# Altium PCB Solder Training Tier 2.PcbDoc
Units mil, origin at the board's own origin, x right, y up, seen from the top; angles counter-clockwise.
Board outline 3015 x 2000 mil, 2 copper layers (Top Layer, Bottom Layer); 54 components, 36 nets, 150 pads, 0 vias.
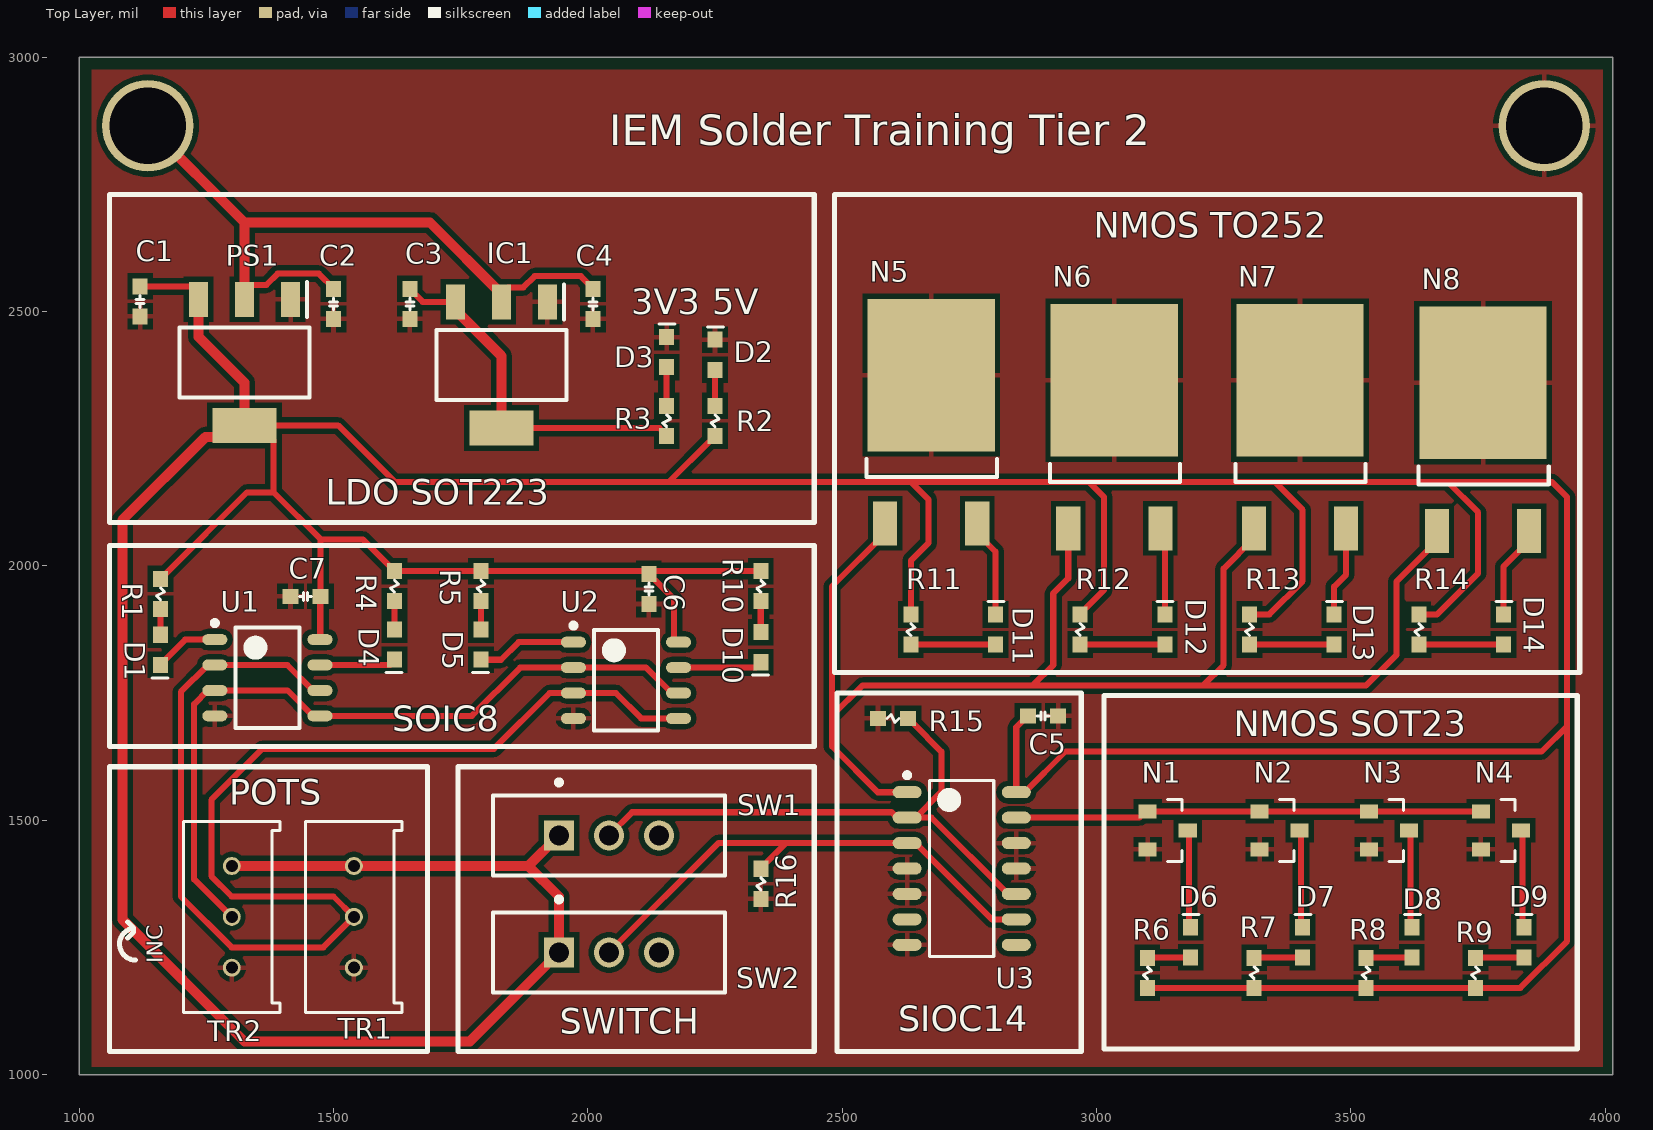
[diagram p0: Top Layer view]
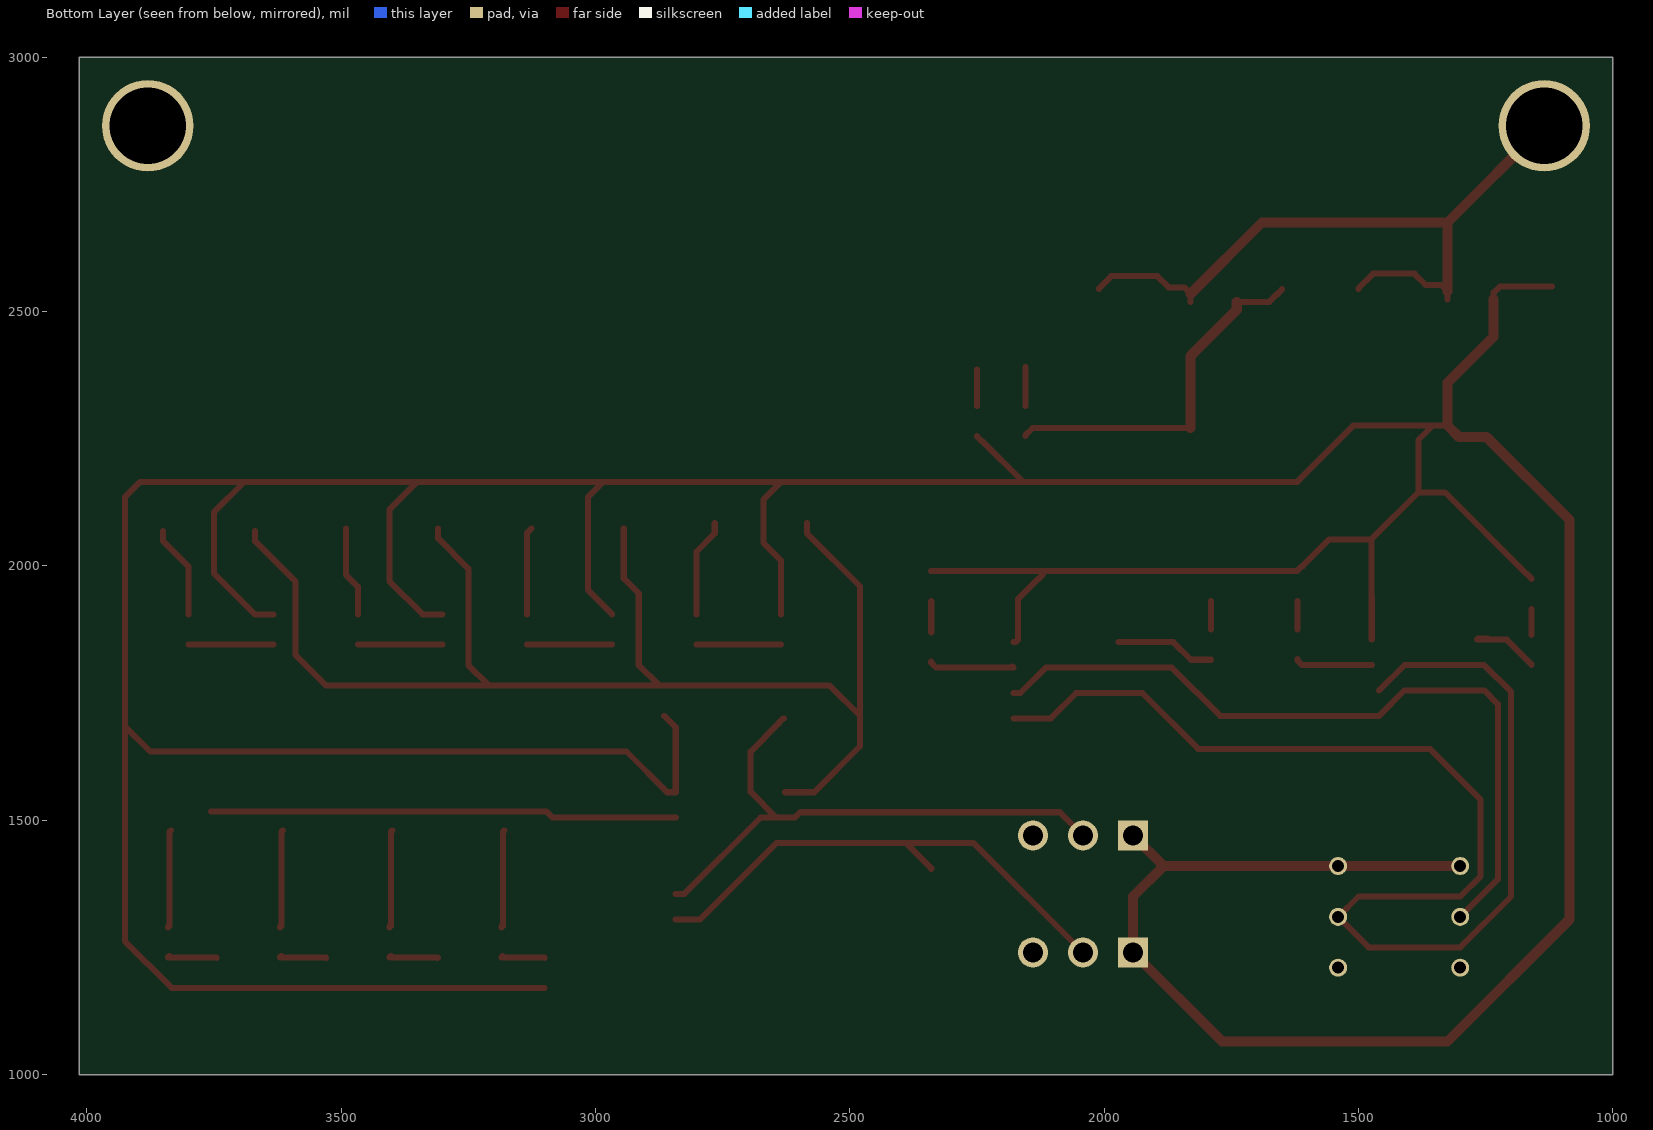
[diagram p1: Bottom Layer view, seen from below]
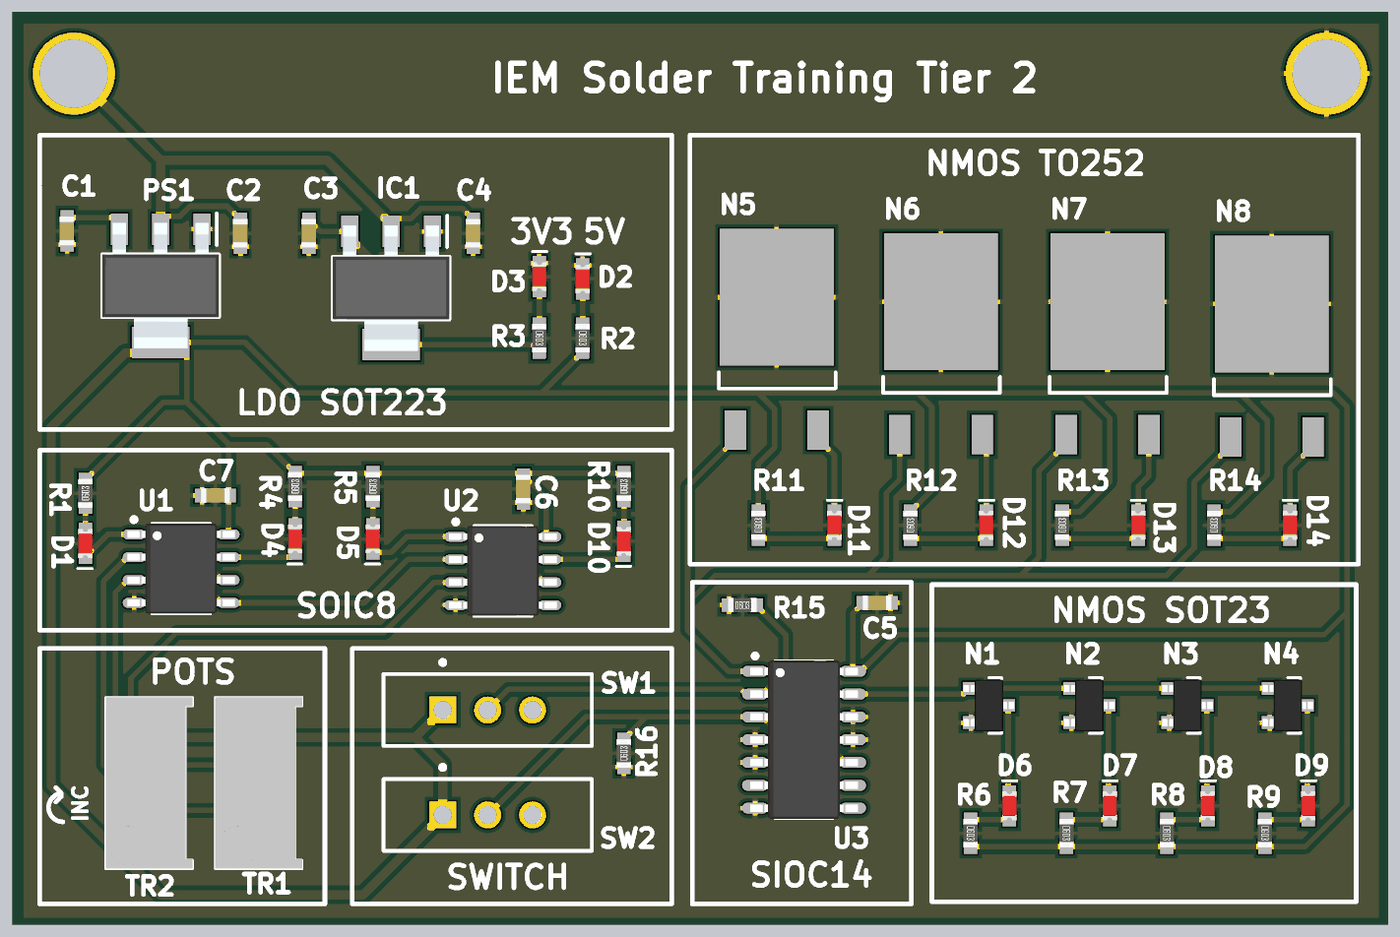
[diagram p2: 3D render of the assembled board from above, using the file's embedded part models]

## Layer stack, top to bottom
Top Solder: solder mask 0.4, Solder Resist, Dk 3.5
Top Layer: signal copper 1.4
Dielectric 1: dielectric 12.6, FR-4, Dk 4.8
Bottom Layer: signal copper 1.4
Bottom Solder: solder mask 0.4, Solder Resist, Dk 3.5

## Board outline
1000,1000 4015,1000 4015,3000 1000,3000

## Design rules (kind name [scope] priority, off if disabled: settings)
Clearance [All] p1: gap=10 ignorepadtopadclearanceinfootprint=FALSE except(0: Arc-Hole Track-Hole SMDPad-Hole THPad-Hole Via-Hole Fill-Hole Poly-Hole Region-Hole Text-Hole)
PolygonConnect [All] p1: connectstyle=Relief reliefconductorwidth=10 reliefentries=4 polygonreliefangle="90 Angle" airgapwidth=10
RoutingVias [All] p1: holewidth=28 width=50 viastyle="Through Hole" minholewidth=28 minwidth=50 maxholewidth=28 maxwidth=50
SolderMaskExpansion [All] p1: expansion=4 istentingtop=FALSE
Width [All] p1: maxlimit=20 minlimit=10 preferedwidth=10 minimp=50.000000 maximp=50.000000 favimp=50.000000
30 further rules are at their usual default settings.

## Components (designator, comment, footprint, x,y, rotation, side; value= is the part's Value field where it differs from the comment)
C1 "2.2uF" CAP-0603 1120,2520 r90 top
C2 "4.7uF" CAP-0603 1500,2515 r90 top
C3 "2.2uF" CAP-0603 1650,2515 r90 top
C4 "4.7uF" CAP-0603 2010,2515 r90 top
C5 "1uF" CAP-0603 2895,1705 r180 top
C6 "1uF" CAP-0603 2120,1954.53 r90 top
C7 "1uF" CAP-0603 1445,1940 r0 top
D1 "LEDRED-0603" LEDRED-0603 1160,1835 r270 top
D2 "LEDRED-0603" LEDRED-0603 2250,2415 r90 top
D3 "LEDRED-0603" LEDRED-0603 2155,2420 r90 top
D4 "LEDRED-0603" LEDRED-0603 1620,1845 r270 top
D5 "LEDRED-0603" LEDRED-0603 1790,1845 r270 top
D6 "LEDRED-0603" LEDRED-0603 3185,1260 r90 top
D7 "LEDRED-0603" LEDRED-0603 3405,1260 r90 top
D8 "LEDRED-0603" LEDRED-0603 3620,1260 r90 top
D9 "LEDRED-0603" LEDRED-0603 3840,1260 r90 top
D10 "LEDRED-0603" LEDRED-0603 2340,1840 r270 top
D11 "LEDRED-0603" LEDRED-0603 2801.43,1875 r90 top
D12 "LEDRED-0603" LEDRED-0603 3134.29,1875 r90 top
D13 "LEDRED-0603" LEDRED-0603 3467.14,1875 r90 top
D14 "LEDRED-0603" LEDRED-0603 3800,1875 r90 top
IC1 "SPX1117M3-L-3-3_TR" SOT230P700X180-4N 1830,2395 r270 top
N1 "NMOS-SOT23" SOT23 3140,1480 r270 top
N2 "NMOS-SOT23" SOT23 3360,1480 r270 top
N3 "NMOS-SOT23" SOT23 3575,1480 r270 top
N4 "NMOS-SOT23" SOT23 3795,1480 r270 top
N5 "NMOS-TO252" TO252 2674.17,2375.35 r0 top
N6 "NMOS-TO252" TO252 3034.17,2365.35 r0 top
N7 "NMOS-TO252" TO252 3399.17,2365.35 r0 top
N8 "NMOS-TO252" TO252 3759.17,2360.35 r0 top
PS1 "SPX1117M3-L-5-0_TR" SOT230P700X170-4N 1325,2400 r270 top
R1 "330" RES-0603 1160,1945 r90 top
R2 "330" RES-0603 2250,2285 r270 top
R3 "200" RES-0603 2155,2285 r270 top
R4 "330" RES-0603 1620,1960 r90 top
R5 "330" RES-0603 1790,1960 r90 top
R6 "330" RES-0603 3100,1200 r270 top
R7 "330" RES-0603 3310,1200 r270 top
R8 "330" RES-0603 3530,1200 r270 top
R9 "330" RES-0603 3745,1200 r270 top
R10 "330" RES-0603 2340,1960 r90 top
R11 "330" RES-0603 2635,1875 r90 top
R12 "330" RES-0603 2967.86,1875 r90 top
R13 "330" RES-0603 3300.71,1875 r90 top
R14 "330" RES-0603 3633.57,1875 r90 top
R15 "5k" RES-0603 2600,1700 r0 top
R16 "5k" RES-0603 2340,1375 r90 top
SW1 "EG1218" ESWI-EG1218_V 2041.57,1470 r0 top
SW2 "EG1218" ESWI-EG1218_V 2041.57,1240 r0 top
TR1 "TRIMPOT_PV36W" TRIMPOT_PV36W 1540,1310 r270 top
TR2 "TRIMPOT_PV36W" TRIMPOT_PV36W 1300,1310 r270 top
U1 "LM393DT" STM-SO-8_D_L 1370,1780 r0 top
U2 "LM393DT" STM-SO-8_D_L 2075,1775 r0 top
U3 "IC-SOIC14_CD4072BM96" SOIC127P600X175-14N 2735,1405 r0 top

## Footprints (in the part's own frame and the unit in brackets; to place one, negate y for a bottom-side part, rotate by r counter-clockwise, add the part's x,y. Pads: shape width x height; smd on the part's side, far side on the other; paste and mask are expansions set on the pad)
CAP-0603 [mm]
  rect 0.8x0.75 smd: 1(-0.75,0) 2(0.75,0)
  silkscreen extent -0.3,-0.2 0.3,0.2, body extent -0.8,-0.4 0.8,0.42, height 0.81
ESWI-EG1218_V [mm] "THD, 3-Leads, Body 11.6x4mm, Pitch 2.5mm"
  rect 1.5x1.5 hole 1: 1(-2.5,0)
  round 1.5 hole 1: 2(0,0) 3(2.5,0)
  silkscreen extent -5.8,-2 5.8,2.77, body extent -5.8,-2 5.8,2, height 7.4
LEDRED-0603 [mm]
  rect 0.8x0.75 smd: A(-0.75,0) K(0.75,0)
  silkscreen extent 1.4,-0.42 1.4,0.38, body extent -0.8,-0.4 0.8,0.4, height 0.53
RES-0603 [mm]
  rect 0.8x0.75 smd: 1(-0.75,0) 2(0.75,0)
  silkscreen extent -0.3,-0.2 0.3,0.2, body extent -0.8,-0.4 0.8,0.4, height 0.44
SOIC127P600X175-14N [mm] "SOIC, 14-Leads, Body 8.65x3.90mm, Pitch 1.27mm, IPC Medium Density"
  oval 1.45x0.6 smd: 1(-2.725,3.81) 2(-2.725,2.54) 3(-2.725,1.27) 4(-2.725,0) 5(-2.725,-1.27) 6(-2.725,-2.54) 7(-2.725,-3.81) 8(2.725,-3.81) 9(2.725,-2.54) 10(2.725,-1.27) 11(2.725,0) 12(2.725,1.27) 13(2.725,2.54) 14(2.725,3.81)
  silkscreen extent -2.85,-4.4 1.6,4.78, body extent -3,-4.4 3,4.4, height 1.75
SOT23 [mm]
  rect 0.7x0.9 smd: 1(-0.95,-1) 2(0.95,-1) 3(0,1)
  silkscreen extent -1.55,0 1.55,0.71, body extent -1.45,-1.41 1.45,1.41, height 1.5
SOT230P700X170-4N [mm]
  rect 1.75x0.95 smd: 1(-3.15,2.3) 2(-3.15,0) 3(-3.15,-2.3)
  rect 1.75x3.2 smd: 4(3.15,0)
  silkscreen extent -4.03,-3.25 1.75,3.25, body extent -3.5,-3.25 3.5,3.25, height 1.7
SOT230P700X180-4N [mm]
  rect 1.75x0.95 smd: 1(-3.15,2.3) 2(-3.15,0) 3(-3.15,-2.3)
  rect 1.75x3.2 smd: 4(3.15,0)
  silkscreen extent -4.03,-3.25 1.75,3.25, body extent -3.5,-3.25 3.5,3.25, height 1.8
STM-SO-8_D_L [mm] "SOIC, 8-Leads, Body 5x4mm, Pitch 1.27mm, IPC High Density"
  oval 1.25x0.55 smd: 1(-2.625,1.905) 2(-2.625,0.635) 3(-2.625,-0.635) 4(-2.625,-1.905) 5(2.625,-1.905) 6(2.625,-0.635) 7(2.625,0.635) 8(2.625,1.905)
  silkscreen extent -2.75,-2.5 1.6,2.85, body extent -3,-2.5 3,2.5, height 1.75
TO252 [mil]
  rect 47.24x86.61 smd: 1(-89.72,-291.69) 3(91.38,-291.69)
  rect 250x300 smd: 2(0.83,-0.35)
  silkscreen extent -126,-200 130,-165, body extent -127,-287 129,56, height 91
TRIMPOT_PV36W [mm]
  round 0.9 hole 0.6: 1(-2.54,0) 2(0,0) 3(2.54,0)
  silkscreen extent -4.76,-2.42 4.76,2.41, body extent -4.77,-2.41 4.75,2.41, height 11.59

## Part data
C1 C2 C3 C4 C5 C6 C7: library part CMP-009-000303-1, Design Item ID=CAP-0603, Source=ife19_Elec_Library.SchLib
D1 D2 D3 D4 D5 D6 D7 D8 D9 D10 D11 D12 D13 D14: library part CMP-009-000189-1, Design Item ID=LEDRED-0603, Source=ife19_Elec_Library.SchLib
IC1: library part CMP-040-000003-1, "Integrated Circuit", Arrow Part Number=SPX1117M3-L-3-3/TR, Manufacturer_Name=EXAR, Mouser Part Number=701-SPX1117M3-L-33TR, Arrow Price/Stock=https://www.arrow.com/en/products/spx1117m3-l-3-3tr/exar, Datasheet Link=https://componentsearchengine.com/Datasheets/2/SPX1117M3-L-3-3_TR.pdf, Design Item ID=SPX1117M3-L-3-3_TR, Height=1.8mm, Manufacturer_Part_Number=SPX1117M3-L-3-3/TR, Mouser Price/Stock=https://www.mouser.com/Search/Refine.aspx?Keyword=701-SPX1117M3-L-33TR, Source=SamacSys.SchLib
N1 N2 N3 N4: library part CMP-009-000184-1, Design Item ID=NMOS-SOT23, Source=ife19_Elec_Library.SchLib
N5 N6 N7 N8: library part CMP-011-000011-1, Package=TO252, Design Item ID=NMOS-TO252, DeviceSetName=DMP10H400SK3-13, GateName_1=G$1, LibraryName=IFE_Transistors, Source=ife19_Elec_Library.SchLib, SymbolName_1=LABELED-PMOS
PS1: library part CMP-042-000000-1, "Power Supply", Arrow Part Number=SPX1117M3-L-5-0/TR, Manufacturer_Name=EXAR, Mouser Part Number=701-SPX1117M3-L-50TR, Arrow Price/Stock=https://www.arrow.com/en/products/spx1117m3-l-5-0tr/exar, Datasheet Link=https://datasheet.datasheetarchive.com/originals/distributors/Datasheets-DGA25/1769206.pdf, Design Item ID=SPX1117M3-L-5-0_TR, Height=1.7mm, Manufacturer_Part_Number=SPX1117M3-L-5-0/TR, Mouser Price/Stock=https://www.mouser.com/Search/Refine.aspx?Keyword=701-SPX1117M3-L-50TR, Source=SamacSys.SchLib
R1 R2 R3 R4 R5 R6 R7 R8 R9 R10 R11 R12 R13 R14 R15 R16: library part CMP-014-000032-1, Design Item ID=RES-0603, Source=ife19_Elec_Library.SchLib
SW1 SW2: library part CMP-1696-00002-1, "Slide Switch, 500 V, -20 to 70 degC, 3-Pin THD, RoHS", Case\Package=SOT-23-5, Dropout Voltage="300 mV", Max Input Voltage="8 V", Max Operating Temperature="85 degC", Max Ouput Current="150 mA", Max Power Dissipation="250 mW", Min Input Voltage="4.3 V", Min Operating Temperature="-40 degC", Nominal Output Voltage="3.3 V", Package Quantity=3000, ComponentLink1Description="Manufacturer URL", ComponentLink1URL=http://www.e-switch.ch/en/, ComponentLink2Description=Datasheet, ComponentLink2URL=https://www.e-switch.com/system/asset/product_line/data_sheet/119/EG.pdf, DatasheetVersion=Oct-15, Height="1.3 mm", Length="3 mm", Mount="Surface Mount", Output Current="150 mA", Output Voltage="3.3 V", Outputs=1, PackageDescription="3-Pin Through Hole Device, Body 11.6 x 4 mm, Pitch 2.5 mm", PackageReference=EG1218, Packaging="Tape and Reel", Pins=5, Power Rating="250 mW", Radiation Hardening=No, REACH SVHC="No SVHC", RoHSCompliant=true, Width="1.8 mm"
TR1 TR2: library part CMP-009-000197-1, Design Item ID=TRIMPOT_PV36W, Source=ife19_Elec_Library.SchLib
U1 U2: library part CMP-2000-06550-1, "Low-Power, Dual-Voltage Comparator, 2 to 36 V, 0 to 70 degC, 8-Pin SOIC (SO), RoHS, Tape and Reel", Current - Input Bias (Max)=0.25µA@5V, Current - Output (Typ)=18mA@5V, Current - Quiescent (Max)=2.5mA, Manufacturer=STMicroelectronics, Operating Temperature=0°C~70°C, Package / Case="8-SOIC(0.154\",3.90mmWidth)", Package Description="8-Pin Small Outline Integrated Circuit, Body 4.9 x 3.9 mm, Pitch 1.27 mm", Package Reference=SO-8, Standard Package=2,500, Supplier Device Package=8-SO, Voltage - Input Offset (Max)=5mV@30V, Voltage - Supply, Single/Dual (±)=2V~36V,±1V~18V, Category=IntegratedCircuits(ICs), Datasheet URL=http://www.st.com/content/ccc/resource/technical/document/datasheet/group1/b4/cc/cf/13/18/28/44/f5/CD00000465/files/CD00000465.pdf/jcr:content/translations/en.CD00000465.pdf, Datasheet Version="Rev. 15, 02/2016", EDA / CAD Models=DownloadfromAcceleratedDesigns, Family=Linear-Comparators, Manufacturer URL=http://www.st.com/, Mounting Technology=SurfaceMount, Mounting Type=SurfaceMount, Number of Elements=2, Online Catalog=Comparators-2elements, Other Names=497-1593-2, Other Related Documents=LM393ViewAllSpecificationsLM393ViewAllSpecifications, Output Type=CMOS,DTL,ECL,MOS,Open-Collector,TTL, Packaging=Tape&Reel(TR), Type=GeneralPurpose
U3: library part CMP-013-000040-1, "Logic Gates CMOS Dual 4-Input OR", Case/Package=SOIC, High Level Output Current=3.4mA, Manufacturer="Texas Instruments", Manufacturer Part Number=CD4072BM96, Max Operating Temperature=125°C, Max Supply Voltage=18V, Min Operating Temperature=-55°C, Min Supply Voltage=3V, Output Current=6.8mA, Package Quantity=1, Quiescent Current=5uA, ComponentLink1Description=http://www.ti.com/general/docs/lit/getliterature.tsp?genericPartNumber=CD4072B-MIL&&fileType=pdf&src-supplier=Avnet, ComponentLink1URL=http://www.ti.com/general/docs/lit/getliterature.tsp?genericPartNumber=CD4072B-MIL&&fileType=pdf&src-supplier=Avnet, ComponentLink2Description=http://www.farnell.com/datasheets/1834701.pdf?src-supplier=Element14, ComponentLink2URL=http://www.farnell.com/datasheets/1834701.pdf?src-supplier=Element14, ComponentLink3Description=http://www.produktinfo.conrad.com/datenblaetter/1000000-1099999/001073543-da-01-en-IC_DUAL_4INPUT_OR_CD4072BM96_SOIC_14_TID.pdf?src-supplier=Conrad, ComponentLink3URL=http://www.produktinfo.conrad.com/datenblaetter/1000000-1099999/001073543-da-01-en-IC_DUAL_4INPUT_OR_CD4072BM96_SOIC_14_TID.pdf?src-supplier=Conrad, Contact Plating=Gold, Design Item ID=IC-SOIC14_CD4072BM96, Lead Free="Lead Free", Logic Function=OR, Low Level Output Current=3.4mA, Mount="Surface Mount", Number of Bits=2, Number of Circuits=2, Number of Elements=2, Number of Gates=2, Number of Input Lines=4, Number of Inputs=4, Number of Output Lines=1, Number of Outputs=1, Number of Pins=14, Packaging="Tape and Reel", Pricing 1="1 = 0.42000, 10 = 0.35900, 100 = 0.26820, 500 = 0.21074, 1000 = 0.16284 (USD)", Propagation Delay=90ns, REACH SVHC="No SVHC", RoHS=Yes, Source=ife19_Elec_Library.SchLib, Stock 1=5874, Turn-On Delay Time=120ns, Weight=0.004564oz

## Free pads (board coordinates)
  round 180 hole 150: 1(1135,2865) 1(3880,2865)

## Nets (pads, with @x,y where several pads share a name; then routed paths per layer and width w, separated by ;. In a path a pad name is that pad's centre, name@x,y a point inside that pad or via, vN(x,y) a via of type N, cw(c..) or ccw(c..) an arc to the next point about the centre after c; other vN are vias at no path point)
+3V3: C3.2 IC1.3 IC1.4 R3.2 | length 718.1
  Top Layer w12: C3.2 1650,2543.54 1658.76,2534.78 1659.75,2534.78 1675.51,2519.02 IC1.3 ; IC1.4 2140.47,2270.98 2155,2256.46 R3.2
  Top Layer w20: IC1.3 1739.45,2503.27 1830,2412.72 IC1.4
+5: C1.2 C5.2 C6.2 C7.2 PS1.3 PS1.4 R1.2 R2.2 R4.2 R5.2 R6.2 R7.2 R8.2 R9.2 R10.2 R11.2 R12.2 R13.2 R14.2 SW1.1 SW2.1 TR1.1 TR2.1 U1.8 U2.8 U3.14 | length 12335.8
  Top Layer w12: C1.2 1221.75,2549.53 1234.45,2536.83 PS1.3 ; R1.2 1160,1975.51 1168.76,1984.28 1169.75,1984.28 1329.89,2144.42 1381.99,2144.42 ; PS1.4 PS1.4@1353.54,2275.98 ; U1.8 1473.94,1855.59 1473.94,1939.41 C7.2 1474.53,2051.88 ; C6.2 2120,1983.07 2128.76,1974.31 2129.75,1974.31 2169.53,1934.53 2169.53,1854.46 2173.99,1850 U2.8 ; R2.2 2250,2254.49 2241.24,2245.72 2240.25,2245.72 2159.53,2165 ; R10.2 R5.2 R4.2 1620,1990.51 1611.24,1999.28 1610.25,1999.28 1557.65,2051.88 1474.53,2051.88 ; R11.2 2635,2010.26 2670,2045.26 2670,2130 2635,2165 ; C5.2 2864.49,1705 2842.28,1682.8 U3.14 2859.02,1555 2939.02,1635 3875,1635 3925,1685 ; R12.2 2967.86,1905.51 3015,1952.65 3015,2135 2985,2165 ; R6.2 R7.2 R8.2 R9.2 3833.14,1170.47 3925,1262.33 3925,1685 ; R13.2 3339.53,1904.53 3405,1970 3405,2110 3350,2165 ; R14.2 3669.53,1904.53 3750,1985 3750,2105 3690,2165 ; PS1.4@1353.54,2275.98 1381.99,2247.54 1381.99,2144.42 ; PS1.4@1353.54,2275.98 1509.02,2275.98 1620,2165 2159.53,2165 ; 1381.99,2144.42 1474.53,2051.88 ; 2159.53,2165 2635,2165 ; 2635,2165 2985,2165 ; 2985,2165 3350,2165 ; 3350,2165 3690,2165 ; 3690,2165 3895,2165 3925,2135 3925,1685
  Top Layer w20: PS1.3 1234.45,2450.55 1325,2360 PS1.4 1302.07,2253.06 1248.06,2253.06 1085,2090 1085,1305 1325,1065 1768.15,1065 SW2.1 1943.15,1350 1883.15,1410 ; TR2.1 TR1.1 1883.15,1410 ; SW1.1 1883.15,1410
+12: C2.2 C4.2 IC1.2 pad.1@1135,2865 PS1.2 | length 1406.2
  Top Layer w12: PS1.2 1325,2539.76 1337.7,2552.46 1368.22,2552.46 1390.22,2574.46 1471.05,2574.46 1500,2545.51 C2.2 ; IC1.2 1830,2534.76 1842.7,2547.46 1873.22,2547.46 1895.22,2569.46 1986.05,2569.46 2010,2545.51 C4.2
  Top Layer w20: pad.1@1135,2865 1325,2675 ; PS1.2@1325,2539.76 1325,2675 ; IC1.2@1830,2534.76 1689.76,2675 1325,2675
GND: C1.1 C2.1 C3.1 C4.1 C5.1 C6.1 C7.1 D2.K D3.K IC1.1 N1.2 N2.2 N3.2 N4.2 N5.2 N6.2 N7.2 N8.2 pad.1@3880,2865 PS1.1 R15.1 R16.1 TR1.3 TR2.3 U1.4 U2.4 U3.4 U3.5 U3.7 U3.11 U3.12
NetD1_A: D1.A R1.1 | length 50.9
  Top Layer w12: D1.A R1.1
NetD1_K: D1.K U1.1 | length 148.5
  Top Layer w12: D1.K 1160,1806.46 1208.54,1855 U1.1 1264.81,1856.85 U1.1@1246.7,1856.85
NetD2_A: D2.A R2.1 | length 70.9
  Top Layer w12: R2.1 D2.A
NetD3_A: D3.A R3.1 | length 75.9
  Top Layer w12: R3.1 D3.A
NetD4_A: D4.A R4.1 | length 55.9
  Top Layer w12: D4.A R4.1
NetD4_K: D4.K U1.7 | length 152.6
  Top Layer w12: U1.7 1610.51,1805 1620,1814.49 D4.K D4.K@1620,1816.46
NetD5_A: D5.A R5.1 | length 55.9
  Top Layer w12: D5.A R5.1
NetD5_K: D5.K U2.1 | length 196
  Top Layer w12: D5.K 1829.26,1815.47 1863.78,1850 U2.1
NetD6_A: D6.A R6.1 | length 87.3
  Top Layer w12: R6.1 3100.47,1230 3180,1230 3182.74,1232.74 D6.A
NetD6_K: D6.K N1.3 | length 193.8
  Top Layer w12: N1.3 3182.18,1477.19 3182.18,1292.34 D6.K D6.K@3185,1290.51
NetD7_A: D7.A R7.1 | length 97.7
  Top Layer w12: R7.1 3310.47,1230 3399.06,1230 3402.26,1233.21 D7.A
NetD7_K: D7.K N2.3 | length 193.8
  Top Layer w12: N2.3 3402.18,1477.19 3402.18,1292.34 D7.K D7.K@3405,1290.51
NetD8_A: D8.A R8.1 | length 92.5
  Top Layer w12: R8.1 3530.47,1230 3614.53,1230 3617.5,1232.97 D8.A
NetD8_K: D8.K N3.3 | length 193.8
  Top Layer w12: N3.3 3617.18,1477.19 3617.18,1292.34 D8.K D8.K@3620,1290.51
NetD9_A: D9.A R9.1 | length 98.9
  Top Layer w12: R9.1 3745.47,1230 3839.53,1230 D9.A D9.A@3837.5,1232.97
NetD9_K: D9.K N4.3 | length 193.8
  Top Layer w12: N4.3 3837.18,1477.19 3837.18,1292.34 D9.K D9.K@3840,1290.51
NetD10_A: D10.A R10.1 | length 60.9
  Top Layer w12: D10.A R10.1
NetD10_K: D10.K U2.7 | length 170.2
  Top Layer w12: U2.7@2180.19,1801.85 U2.7 2330.51,1800 2340,1809.49 D10.K D10.K@2340,1811.46
NetD11_A: D11.A R11.1 | length 166.4
  Top Layer w12: R11.1 D11.A
NetD11_K: D11.K N5.3 | length 194
  Top Layer w12: N5.3 2765.55,2063.97 2801.43,2028.1 D11.K
NetD12_A: D12.A R12.1 | length 166.4
  Top Layer w12: R12.1 D12.A
NetD12_K: D12.K N6.3 | length 172.8
  Top Layer w12: N6.3 3134.29,2064.92 D12.K
NetD13_A: D13.A R13.1 | length 166.4
  Top Layer w12: R13.1 D13.A
NetD13_K: D13.K N7.3 | length 178.8
  Top Layer w12: D13.K 3467.14,1959.23 3490.55,1982.64 N7.3
NetD14_A: D14.A R14.1 | length 166.4
  Top Layer w12: R14.1 D14.A
NetD14_K: D14.K N8.3 | length 185.1
  Top Layer w12: D14.K 3800,1998.42 3850.55,2048.97 N8.3
NetN1_1: N1.1 N2.1 N3.1 N4.1 U3.13 | length 918.5
  Top Layer w12: U3.13 3084.29,1505 3096.69,1517.4 N1.1 N2.1 N3.1 N4.1
NetN5_1: N5.1 N6.1 N7.1 N8.1 U3.1 | length 2790.5
  Top Layer w12: N5.1 2584.45,2063.97 2480,1959.53 2480,1705 ; U3.1 2570,1555 2480,1645 2480,1705 ; N6.1 2944.45,1975.4 2915,1945.95 2915,1805 2875,1765 ; N7.1 3309.45,2053.97 3250,1994.53 3250,1805 3210,1765 ; N8.1 3669.45,2048.97 3590,1969.53 3590,1825 3530,1765 3210,1765 ; 2480,1705 2540,1765 2875,1765 ; 2875,1765 3210,1765
NetR15_2: R15.2 SW1.2 U3.2 U3.10 | length 1129.7
  Top Layer w12: SW1.2 2087.1,1515.53 2597.31,1515.53 2607.84,1505 U3.2 U3.2@2644.44,1505 ; R15.2 2630.51,1700 2639.28,1691.24 2639.28,1690.25 2695,1634.53 2695,1555.56 U3.2@2644.44,1505 ; U3.10 2825.55,1355 2675.55,1505 U3.2@2644.44,1505
NetR16_2: R16.2 SW2.2 U3.3 U3.9 | length 1022.9
  Top Layer w12: SW2.2 2256.57,1455 2389.49,1455 ; R16.2 2340,1405.51 2389.49,1455 ; U3.9 2794.45,1305 2644.45,1455 U3.3 2389.49,1455
NetTR1_2: TR1.2 U1.2 U1.6 U2.3 U2.5 | length 2599.8
  Top Layer w12: U1.6@1459.57,1755 1409.57,1805 U1.2 1252.87,1805 1200,1752.13 1200,1350 1300,1250 1480,1250 TR1.2 1500,1350 1300,1350 1260,1390 1260,1540 1360,1640 1815,1640 1925,1750 U2.3 2055,1750 2105,1700 U2.5
NetTR2_2: TR2.2 U1.3 U1.5 U2.2 U2.6 | length 1493
  Top Layer w12: TR2.2 1226.05,1383.95 1226.05,1728.17 1252.87,1755 U1.3 1409.57,1755 1459.57,1705 U1.5 1771.93,1705 1866.93,1800 U2.2 2114.57,1800 2164.57,1750 U2.6
pads on no net: SW1.3 SW2.3 U3.6 U3.8

## Polygon pours and split planes (outlines as drawn)
GND on Top Layer "GND_L01_P000" (solid, pour order 0): 1025,2975 3995,2975 3995,1015 1025,1015

## Silkscreen, mask and mechanical layers (free items; w line width, h text height)
Top Overlay:
  lines w10: 1095.34,1268.25 1107.01,1279.93 1107.01,1287.8 ccw(c1111.08,1256.44) 1110.95,1224.81 ; 1095.34,1299.74 1107.01,1288.06 ; 1060,1045 1060,1605 1685,1605 1685,1045 1060,1045 ; 1060,1645 1060,2040 2445,2040 2445,1645 1060,1645 ; 1060,2085 1060,2270 1060,2570 1060,2617.5 1060,2712.5 1060,2730 2445,2730 2445,2085 1060,2085 ; 1745,1045 2445,1045 2445,1605 1745,1605 1745,1045 ; 2485,1790 3950,1790 3950,2730 2485,2730 2485,1790 ; 2490,1045 2970,1045 2970,1750 2490,1750 2490,1045 ; 3015,1050 3945,1050 3945,1745 3015,1745 3015,1050
  text "IEM Solder Training Tier 2" at 2042,2827 h60
  text "NMOS TO252" at 2995,2645 h50
  text "3V3" at 2085,2495 h50
  text "5V" at 2245,2495 h50
  text "LDO SOT223" at 1485,2120 h50
  text "SOIC8" at 1615,1675 h50
  text "NMOS SOT23" at 3270,1665 h50
  text "POTS" at 1295,1530 h50
  text "INC" at 1164.08,1219.19 h31.5 r90
  text "SIOC14" at 2610,1085 h50
  text "SWITCH" at 1945,1080 h50
Bottom Solder:
  drawing of 3 lines, arcs and shapes, not listed